# EAGLE board DisplayDin (EAGLE 9.2.2)
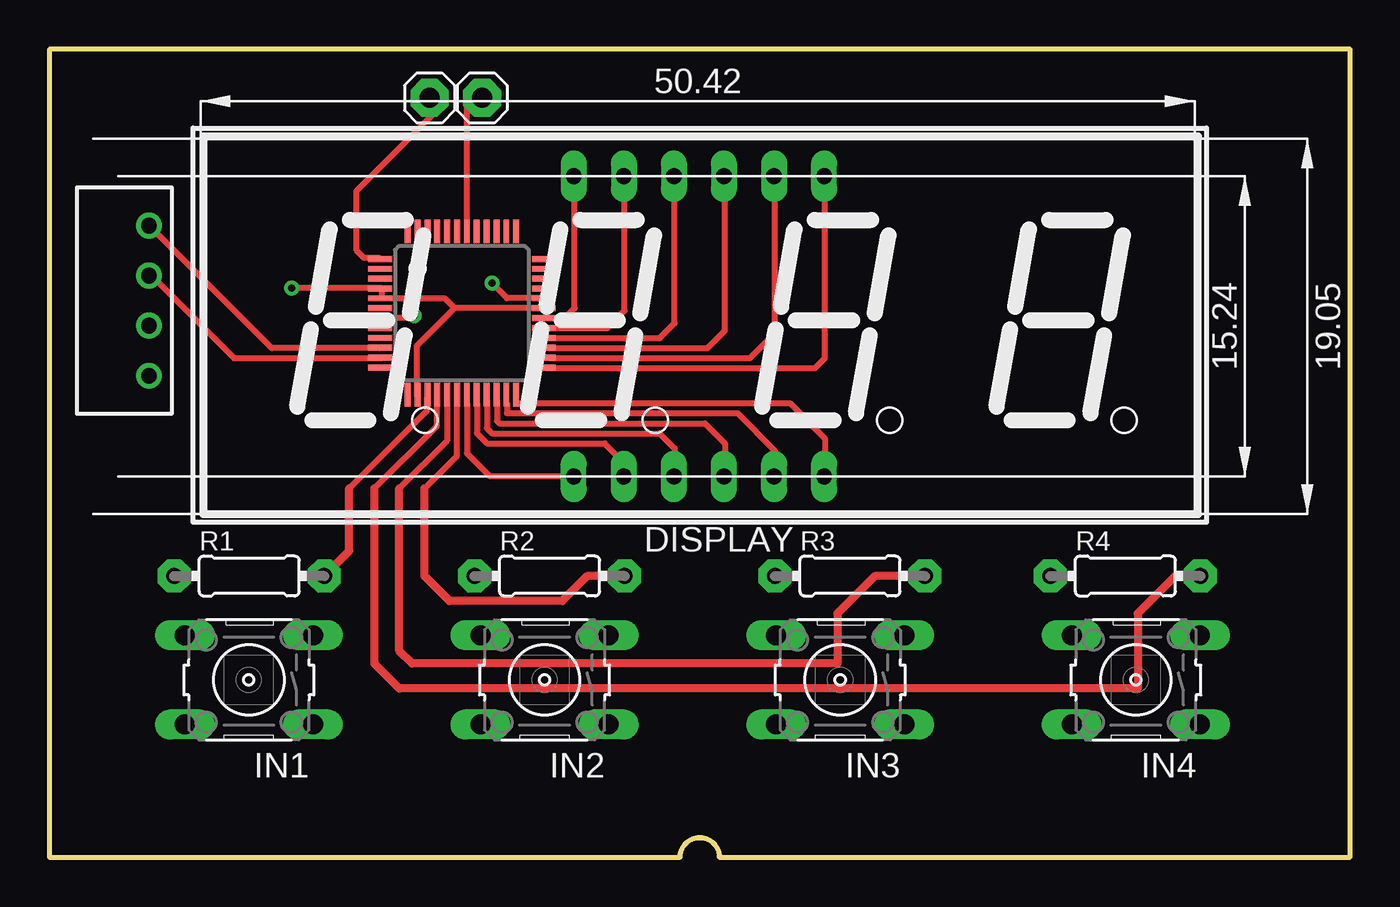
[diagram p0: board, top side]
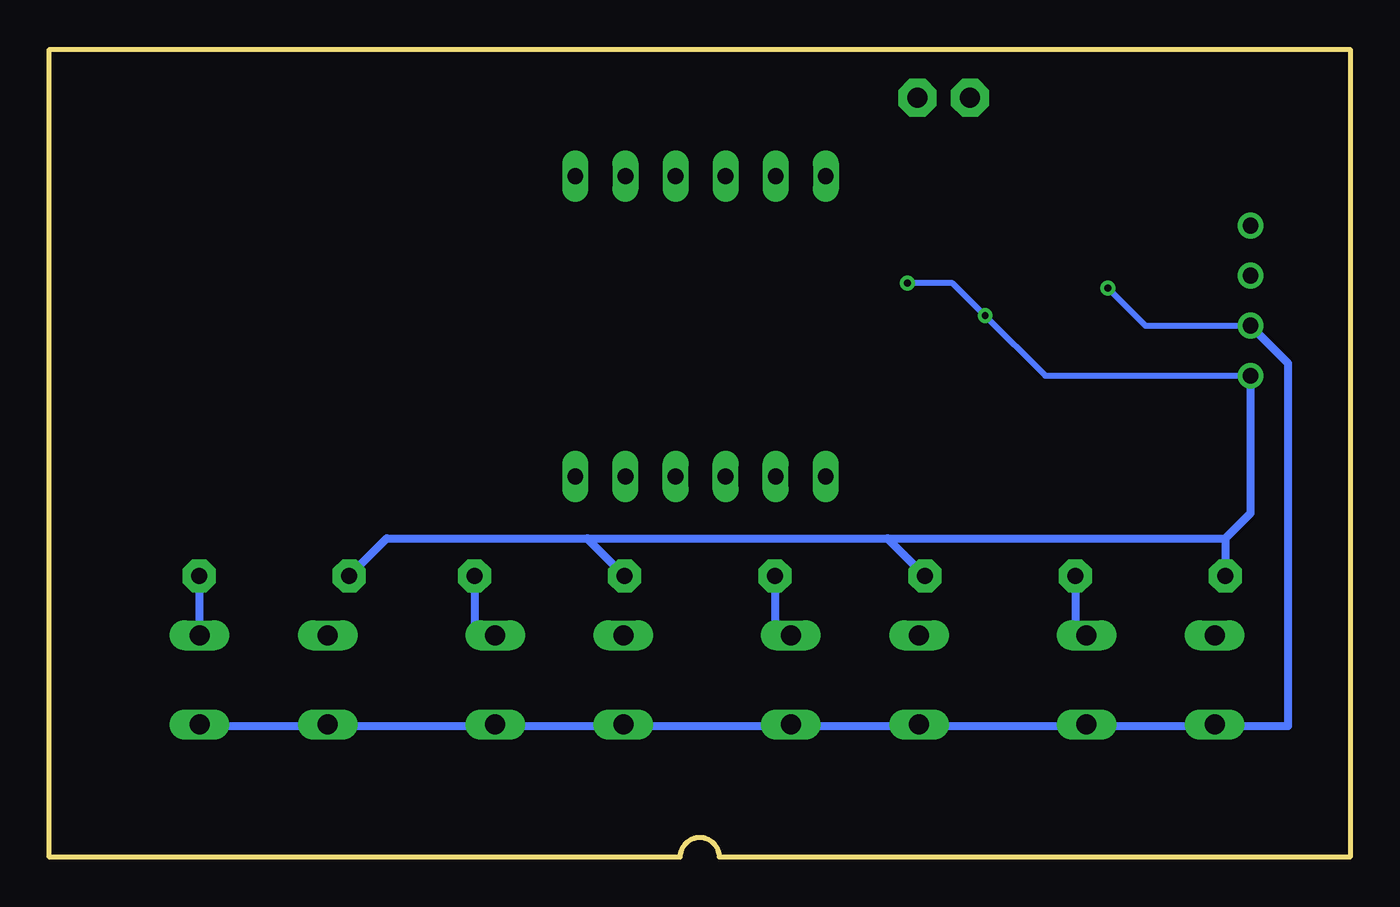
[diagram p1: board, bottom side, seen from below]

Size 66 x 41 mm. Coordinates in mm from the lower left corner, seen from the top.
Outline: 66,0 66,41 0,41 0,0 32,0 arc-180 34,0 66,0
Copper layers (1*16): Top 0.035mm / dielectric 1.5mm / Bottom 0.035mm
Design rules "default": minimum track width 6mil, minimum drill 0.35mm, track to track 6mil, track to pad 6mil, pad to pad 6mil, via to via 6mil, smd to smd 6mil, copper to edge 40mil, drill to drill 6mil, minimum pad ring 10mil, minimum via ring 8mil, stop-mask expansion 4mil, vias tented up to drill 0mil, thermal gap 10mil

## Footprints (pad centres in the part's own frame; a part is rotated, then mirrored left to right if it is on the bottom)
4SIL = drill 0.8: 1 -3.81,0; 2 -1.27,0; 3 1.27,0; 4 3.81,0
4DIG_7SEG_056 = drill 0.8 long: 1 -1.016,-11.43; 2 1.524,-11.43; 3 4.064,-11.43; 4 6.604,-11.43; 5 9.144,-11.43; 6 11.684,-11.43; 9 11.684,3.81; 10 9.144,3.81; 11 6.604,3.81; 12 4.064,3.81; 13 1.524,3.81; 14 -1.016,3.81
TQFP48_7X7 = smd 0.3 x 1.2: 1 -2.75,-4.15; 2 -2.25,-4.15; 3 -1.75,-4.15; 4 -1.25,-4.15; 5 -0.75,-4.15; 6 -0.25,-4.15; 7 0.25,-4.15; 8 0.75,-4.15; 9 1.25,-4.15; 10 1.75,-4.15; 11 2.25,-4.15; 12 2.75,-4.15; 25 2.75,4.15; 26 2.25,4.15; 27 1.75,4.15; 28 1.25,4.15; 29 0.75,4.15; 30 0.25,4.15; 31 -0.25,4.15; 32 -0.75,4.15; 33 -1.25,4.15; 34 -1.75,4.15; 35 -2.25,4.15; 36 -2.75,4.15 | smd 1.2 x 0.3: 13 4.15,-2.75; 14 4.15,-2.25; 15 4.15,-1.75; 16 4.15,-1.25; 17 4.15,-0.75; 18 4.15,-0.25; 19 4.15,0.25; 20 4.15,0.75; 21 4.15,1.25; 22 4.15,1.75; 23 4.15,2.25; 24 4.15,2.75; 37 -4.15,2.75; 38 -4.15,2.25; 39 -4.15,1.75; 40 -4.15,1.25; 41 -4.15,0.75; 42 -4.15,0.25; 43 -4.15,-0.25; 44 -4.15,-0.75; 45 -4.15,-1.25; 46 -4.15,-1.75; 47 -4.15,-2.25; 48 -4.15,-2.75
1X01 = drill 1.016 pad 1.93 octagon: 1 0,0
B3F-10XX = drill 1.016 long: 1 -3.251,2.261; 2 3.251,2.261; 3 -3.251,-2.261; 4 3.251,-2.261
0204/7 = drill 0.813 pad 1.676 octagon: 1 -3.81,0; 2 3.81,0

## Placement (x,y rotation side)
CONN  [4SIL]  5.06,28.25 90 top
DISPLAY  [4DIG_7SEG_056]  27.62,30.75 0 top
E$1  [TQFP48_7X7]  20.93,27.61 270 top
E$2  [1X01]  21.95,38.53 0 top
E$3  [1X01]  19.28,38.53 0 top
IN1  [B3F-10XX]  10.12,9 180 top
IN2  [B3F-10XX]  25.12,9 180 top
IN3  [B3F-10XX]  40.12,9 180 top
IN4  [B3F-10XX]  55.12,9 180 top
R1  [0204/7]  10.14,14.28 0 top
R2  [0204/7]  25.38,14.28 0 top
R3  [0204/7]  40.62,14.28 0 top
R4  [0204/7]  54.59,14.28 0 top

## Library data of the parts
CONN = dc-dc-converter
DISPLAY = Aliexpress_ok
E$1 = freescale
E$2 E$3 R1-R4 = adafruit
IN1-IN4 = DC_LOAD_AU

## Nets
S$1: R1.2
S$2: R2.2
S$3: R3.2
S$4: R4.2
S$5: CONN.1 R1.1 R2.1 R3.1 R4.1
S$10: CONN.4
S$12: CONN.2

## Tracks (layer width: path | path; a pad name or v marks a point on that pad's centre or on a via)
S$1
  Top 0.305: 15.22,18.72 19.16,22.66 19.16,23.29
  Top 0.406: R1.2 15.22,15.54 15.22,18.72
  Bottom 0.406: R1.2 13.95,11.73 13.32,11.1
S$2
  Top 0.305: 19.03,18.72 20.68,20.37 20.68,23.16
  Top 0.406: R2.2 27.29,14.28 26.02,13 20.3,13 19.03,14.28 19.03,18.72
  Bottom 0.406: 28.55,11.1 29.19,11.73 R2.2
S$3
  Top 0.305: 20.17,23.16 20.17,21.13 17.76,18.72
  Top 0.406: R3.2 41.89,14.28 39.98,12.37 39.98,9.83 18.39,9.83 17.76,10.46 17.76,18.72
  Bottom 0.406: 43.79,11.1 44.43,11.73 R3.2
S$4
  Top 0.305: 16.49,18.72 19.66,21.89 19.66,23.16
  Top 0.406: R4.2 57.13,14.28 55.22,12.37 55.22,8.56 17.76,8.56 16.49,9.83 16.49,18.72
  Bottom 0.406: R4.2 58.4,11.1
S$5
  Bottom 0.406: R4.1 48.88,16.18 38.71,16.18 | 38.71,16.18 23.48,16.18 | 23.48,16.18 6.33,16.18 | 6.33,16.18 R1.1 | R2.1 23.48,16.18 | R3.1 38.71,16.18 | CONN.1 5.06,17.45 6.33,16.18
S$6
  Top 0.305: 23.22,23.04 23.22,22.53 34.9,22.53 36.81,20.62 36.81,19.23
S$7
  Top 0.305: 21.19,31.29 21.19,38.53
S$8
  Top 0.305: 16.74,30.4 15.98,30.4 15.6,30.79 15.6,33.83 19.79,38.02
S$9
  Top 0.305: 5.19,29.52 9.38,25.32 16.87,25.32
S$10
  Top 0.305: 16.74,25.83 11.28,25.83 CONN.4
S$11
  Top 0.305: 24.87,27.86 20.55,27.86 | 20.55,27.86 20.05,28.37 16.87,28.37 16.87,28.88 12.43,28.88 | 18.65,23.42 18.65,25.96 20.55,27.86
S$12  (via drill 0.35)
  Bottom 0.305: v12.3,28.88 10.39,26.98 CONN.2
  Bottom 0.406: CONN.2 3.15,25.07 3.15,6.65 58.4,6.65
S$13  (via drill 0.35)
  Top 0.305: 16.74,26.85 16.74,27.36 18.39,27.36 v18.52,27.48 | 25,28.37 23.22,28.37 v22.46,29.13
  Bottom 0.305: 5.19,24.43 15.47,24.43 v18.52,27.48 20.17,29.13 v22.46,29.13
S$14
  Top 0.305: 23.73,23.04 37.57,23.04 39.35,21.26 39.35,19.48
S$15
  Top 0.305: 25.25,24.82 38.84,24.82 39.35,25.32 39.35,34.47
S$16
  Top 0.305: 21.19,23.04 21.19,20.5 22.33,19.36 26.52,19.36
S$17
  Top 0.305: 21.7,23.04 21.7,21.51 22.21,21.01 28.17,21.01 29.06,20.12 29.06,19.23
S$18
  Top 0.305: 22.21,23.16 22.21,21.77 22.46,21.51 30.97,21.51 31.73,20.75 31.73,19.23
S$19
  Top 0.305: 22.71,23.16 22.71,22.15 22.84,22.02 33.25,22.02 34.27,21.01 34.27,19.23
S$20
  Top 0.305: 25.38,25.32 35.54,25.32 36.81,26.59 36.81,34.59
S$21
  Top 0.305: 25.38,25.83 33.38,25.83 34.27,26.72 34.27,34.59
S$22
  Top 0.305: 25.25,26.34 30.97,26.34 31.73,27.1 31.73,34.47
S$23
  Top 0.305: 25.25,26.85 28.3,26.85 29.19,27.74 29.19,34.59
S$24
  Top 0.305: 25.25,27.36 26.14,27.36 26.65,27.86 26.65,34.47

## Text on the board
tValues: rx | tx | - | +